# Altium PCB epfl_logo_example.PcbDoc
Units mm, origin at the board's own origin, x right, y up, seen from the top; angles counter-clockwise.
Board outline 90 x 105 mm, 2 copper layers (Top Layer, Bottom Layer); 5 components, 0 nets, 0 pads, 0 vias.
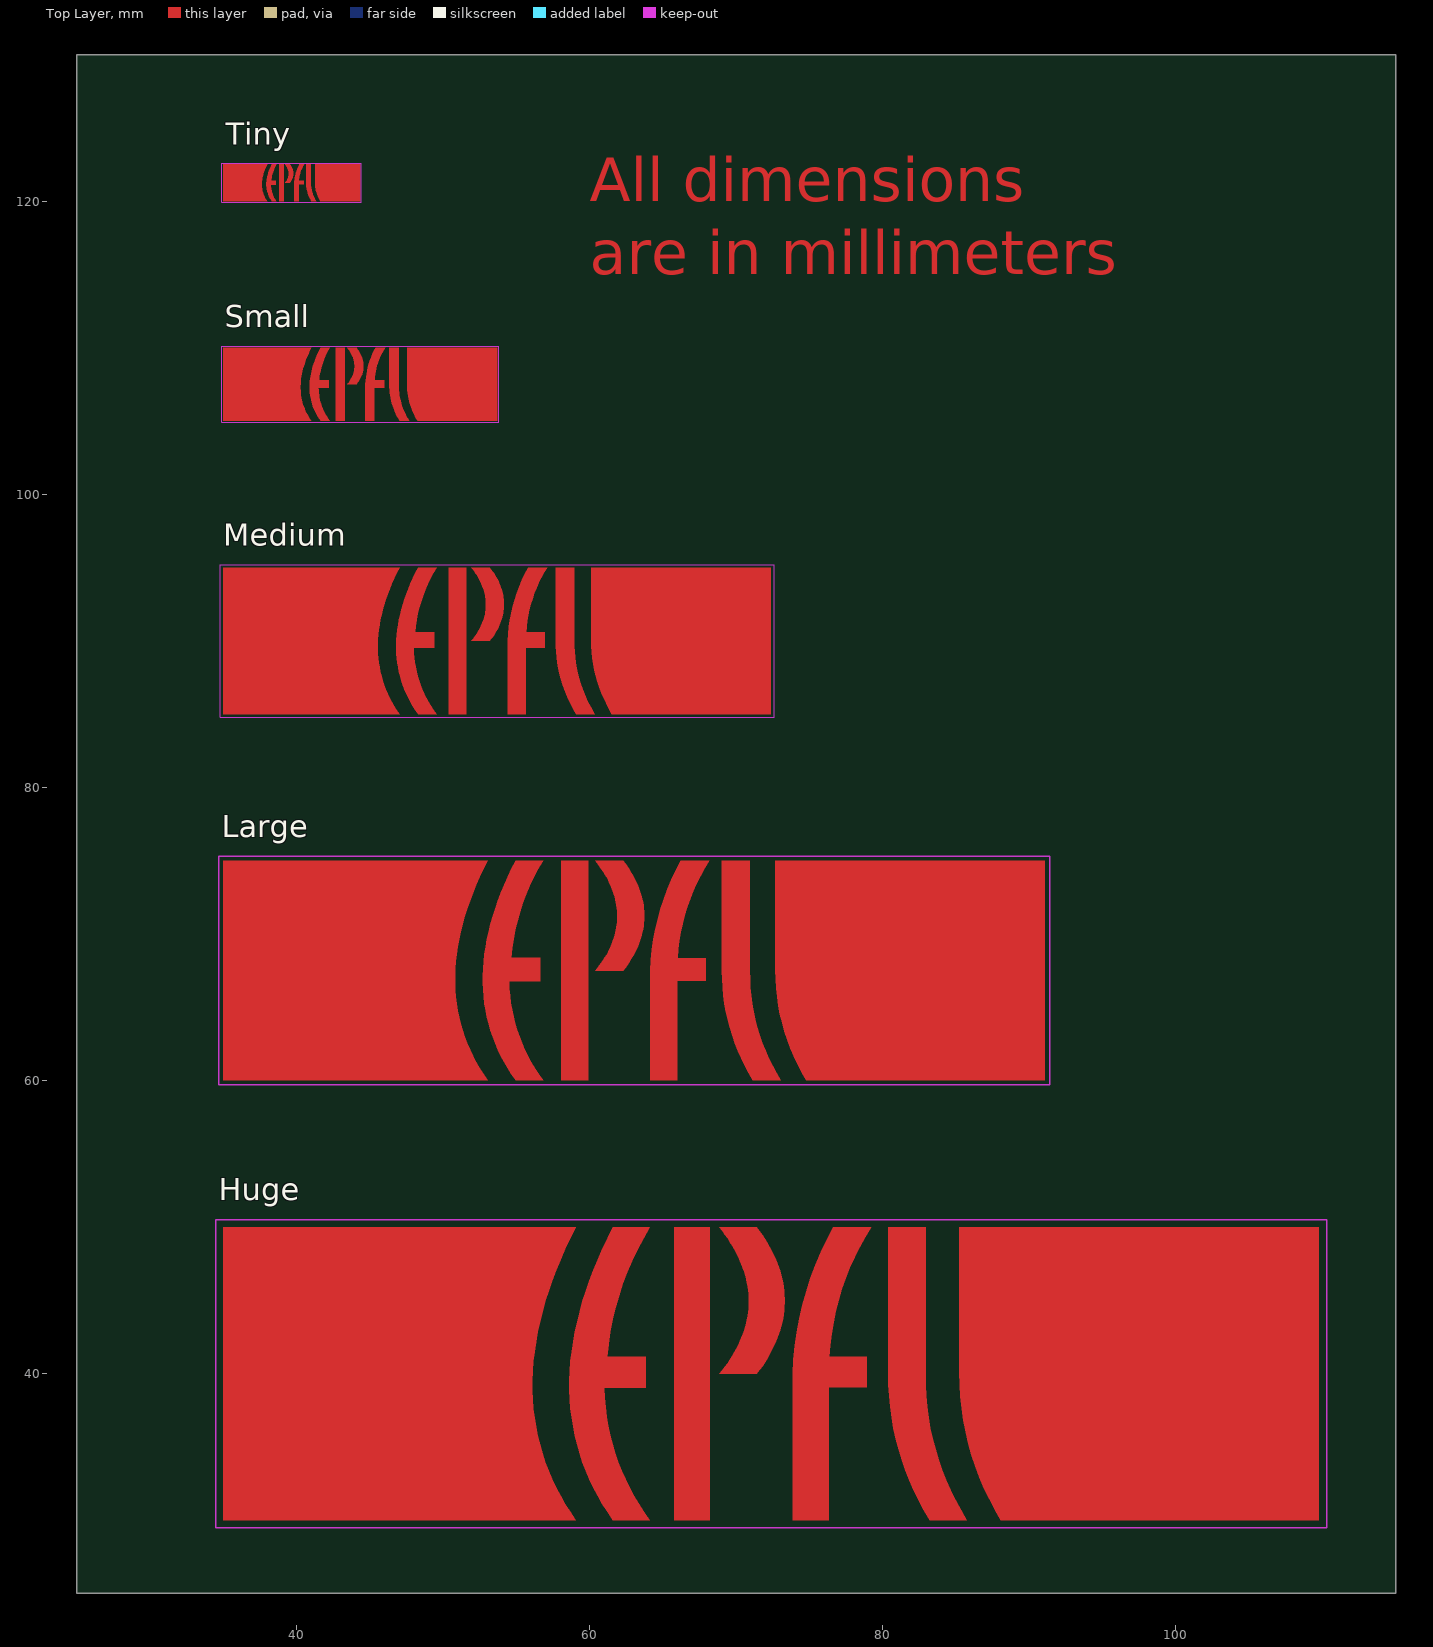
[diagram p0: Top Layer view]
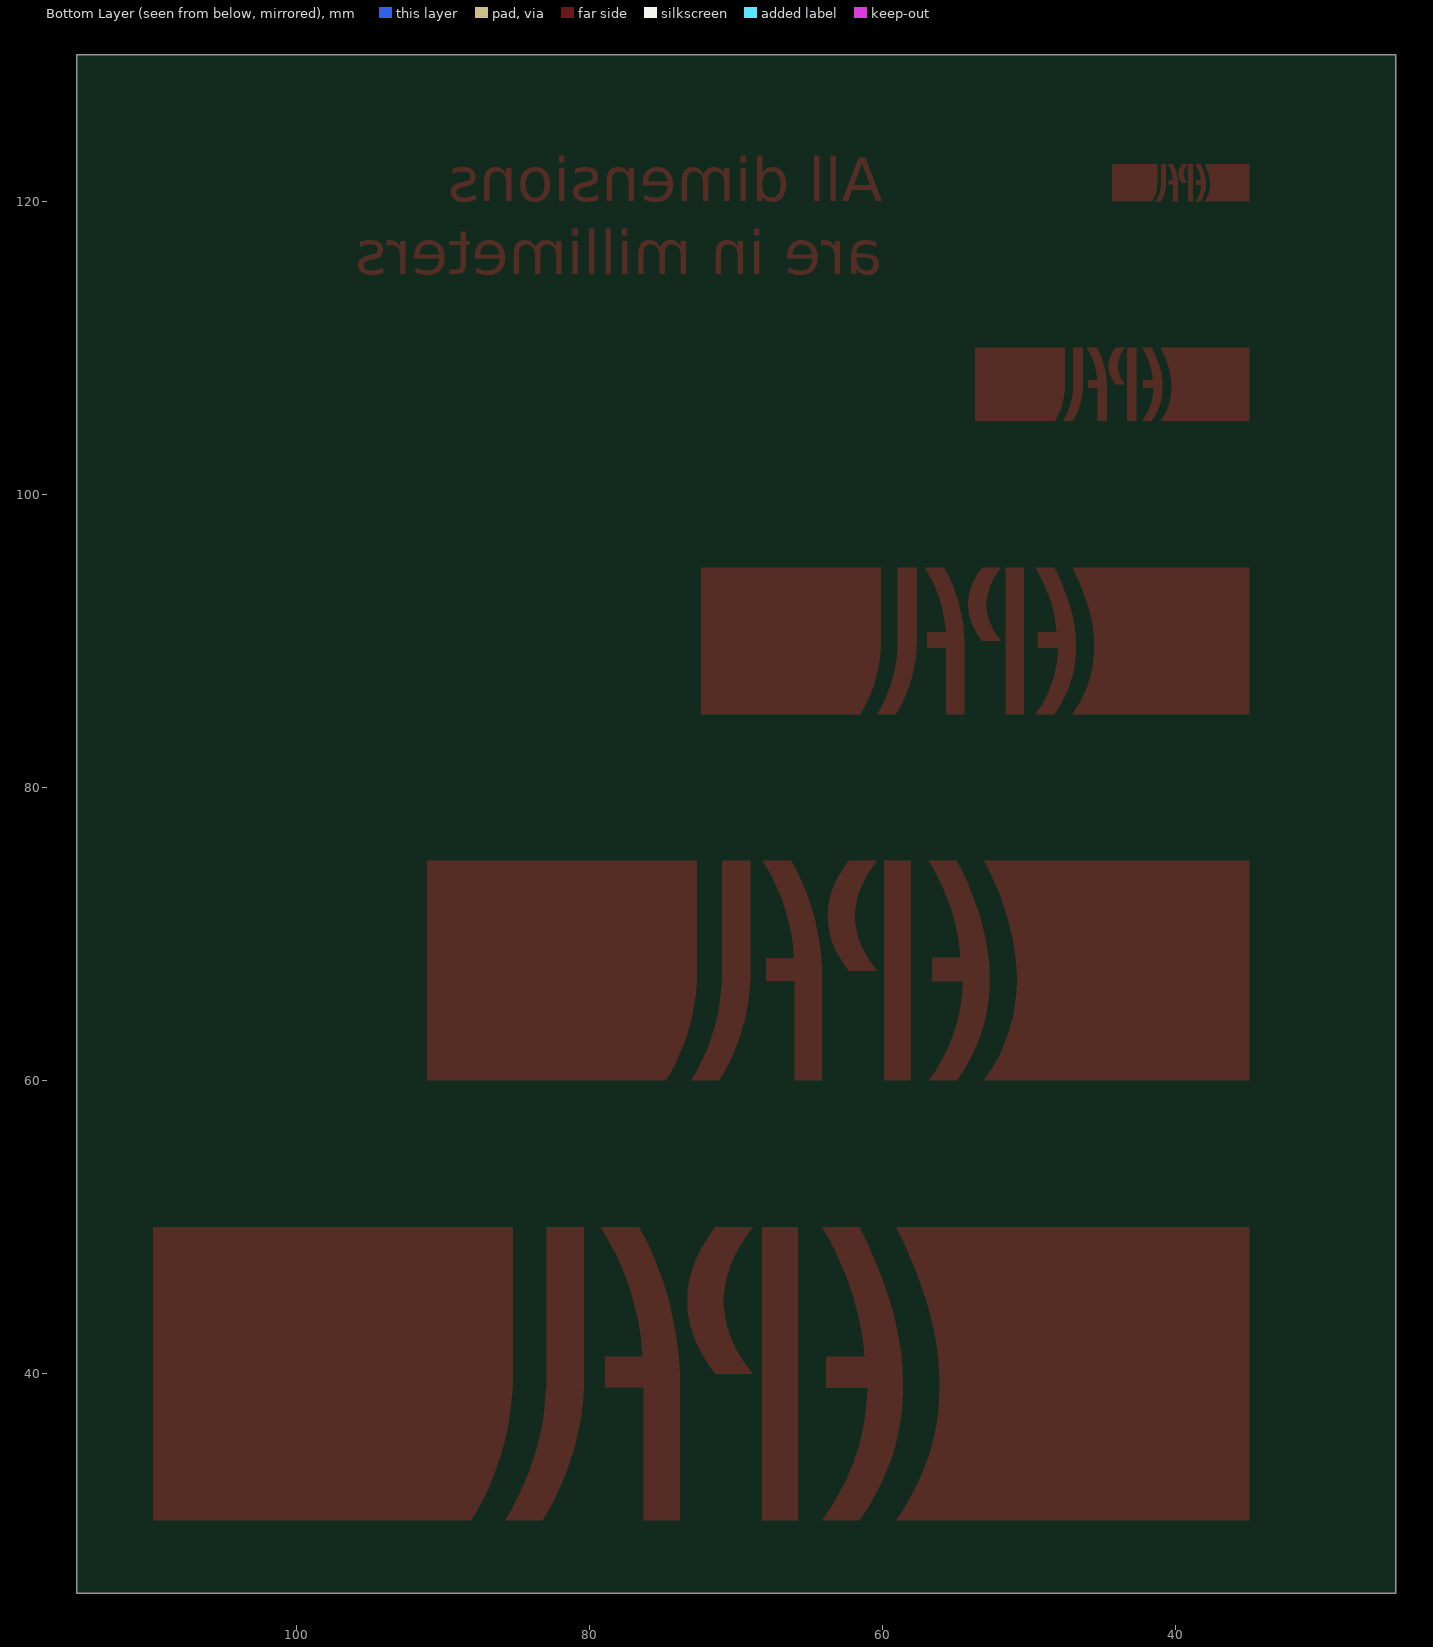
[diagram p1: Bottom Layer view, seen from below]

## Layer stack, top to bottom
Top Layer: signal copper 0.0356
Dielectric: dielectric 0.32, FR-4, Dk 4.8
Bottom Layer: signal copper 0.0356

## Board outline
25,25 25,130 115,130 115,25

## Design rules (kind name [scope] priority, off if disabled: settings)
Clearance [All] p1: gap=0.254
PolygonConnect [All] p1: connectstyle=Relief reliefconductorwidth=0.254 reliefentries=4 polygonreliefangle="90 Angle" airgapwidth=0.254
RoutingVias [All] p1: holewidth=0.711 width=1.27 viastyle="Through Hole" minholewidth=0.711 minwidth=1.27 maxholewidth=0.711 maxwidth=1.27
SolderMaskExpansion [All] p1: expansion=0.102
Width [All] p1: maxlimit=0.254 minlimit=0.254 preferedwidth=0.254
28 further rules are at their usual default settings.

## Components (designator, comment, footprint, x,y, rotation, side; value= is the part's Value field where it differs from the comment)
Huge "Comment" EPFL_LOGO_HUGE 35,30 r0 top
Large "Comment" EPFL_LOGO_LARGE 35,60 r0 top
Medium "Comment" EPFL_LOGO_MEDIUM 35,85 r0 top
Small "Comment" EPFL_LOGO_SMALL 35,105 r0 top
Tiny "Comment" EPFL_LOGO_TINY 35,120 r0 top

## Footprints (in the part's own frame and the unit in brackets; to place one, negate y for a bottom-side part, rotate by r counter-clockwise, add the part's x,y. Pads: shape width x height; smd on the part's side, far side on the other; paste and mask are expansions set on the pad)
EPFL_LOGO_HUGE [mm] "EPFL Logo, 74.76x20mm"
  Top Layer region: 21.177,7.608 21.127,8.24 21.102,8.879 21.102,9.524 21.127,10.176 21.177,10.834 21.251,11.499 21.35,12.171 21.474,12.85 21.623,13.535 21.796,14.226 21.995,14.925 22.218,15.63 22.466,16.342 22.739,17.06 23.036,17.785 23.359,18.517 23.706,19.255 24.078,20 0,20 0,0 24.078,0 23.706,0.545 23.359,1.097 23.036,1.656 22.739,2.221 22.466,2.793 22.218,3.372 21.995,3.957 21.796,4.549 21.623,5.148 21.474,5.753 21.35,6.365 21.251,6.983
  Top Layer region: 23.998,5.753 23.874,6.365 23.775,6.983 23.701,7.608 23.651,8.24 23.626,8.879 23.626,9.524 23.651,10.176 23.701,10.834 23.775,11.499 23.874,12.171 23.998,12.85 24.147,13.535 24.321,14.226 24.519,14.925 24.742,15.63 24.99,16.342 25.263,17.06 25.561,17.785 25.883,18.517 26.23,19.255 26.602,20 29.126,20 28.687,19.246 28.283,18.483 27.913,17.71 27.579,16.926 27.279,16.133 27.015,15.33 26.785,14.517 26.59,13.694 26.429,12.861 26.304,12.018 26.214,11.165 28.835,11.165 28.835,9.029 26.019,9.029 26.049,8.366 26.105,7.711 26.185,7.065 26.291,6.428 26.422,5.799 26.579,5.18 26.761,4.569 26.968,3.967 27.2,3.374 27.458,2.79 27.741,2.214 28.049,1.647 28.383,1.089 28.742,0.54 29.126,0 26.602,0 26.23,0.545 25.883,1.097 25.561,1.656 25.263,2.221 24.99,2.793 24.742,3.372 24.519,3.957 24.321,4.549 24.147,5.148
  Top Layer region: 30.777,0 30.777,20 33.204,20 33.204,0
  Top Layer region: 33.857,9.979 34.053,10.224 34.239,10.47 34.415,10.716 34.581,10.963 34.737,11.209 34.883,11.456 35.019,11.703 35.144,11.951 35.26,12.198 35.365,12.446 35.461,12.694 35.546,12.943 35.622,13.191 35.687,13.44 35.742,13.689 35.788,13.939 35.823,14.189 35.848,14.438 35.863,14.689 35.868,14.939 35.863,15.19 35.848,15.441 35.823,15.692 35.788,15.943 35.742,16.195 35.687,16.447 35.622,16.699 35.546,16.951 35.461,17.204 35.365,17.457 35.26,17.71 35.144,17.964 35.019,18.217 34.883,18.471 34.737,18.725 34.581,18.98 34.415,19.234 34.239,19.489 34.053,19.745 33.857,20 36.418,20 36.618,19.728 36.806,19.455 36.983,19.183 37.15,18.911 37.305,18.639 37.449,18.367 37.582,18.095 37.704,17.823 37.815,17.551 37.915,17.28 38.003,17.008 38.081,16.736 38.148,16.465 38.203,16.194 38.247,15.923 38.281,15.652 38.303,15.38 38.314,15.11 38.314,14.839 38.303,14.568 38.281,14.297 38.247,14.027 38.203,13.756 38.148,13.486 38.081,13.216 38.003,12.945 37.915,12.675 37.815,12.405 37.704,12.135 37.582,11.865 37.449,11.596 37.305,11.326 37.15,11.056 36.983,10.787 36.806,10.517 36.618,10.248 36.418,9.979
  Top Layer region: 38.86,0 38.86,9.979 38.914,10.939 39.007,11.889 39.14,12.83 39.313,13.761 39.525,14.682 39.776,15.593 40.068,16.494 40.398,17.385 40.769,18.267 41.179,19.138 41.628,20 44.228,20 43.816,19.321 43.435,18.632 43.085,17.931 42.767,17.22 42.48,16.497 42.225,15.764 42.001,15.02 41.808,14.266 41.647,13.5 41.518,12.723 41.419,11.936 41.353,11.138 43.916,11.138 43.916,9.066 41.312,9.066 41.312,0
  Top Layer region: 46.546,3.409 46.301,4.112 46.085,4.821 45.898,5.538 45.739,6.262 45.61,6.992 45.509,7.73 45.437,8.475 45.394,9.226 45.38,9.985 45.38,20 47.925,20 47.925,9.983 47.933,9.228 47.971,8.479 48.039,7.737 48.136,7.001 48.263,6.272 48.42,5.549 48.607,4.833 48.824,4.123 49.07,3.42 49.346,2.723 49.652,2.032 49.988,1.348 50.353,0.671 50.749,0 48.201,0 47.812,0.668 47.453,1.343 47.121,2.024 46.819,2.713
  Top Layer region: 50.509,6.804 50.391,7.604 50.306,8.411 50.254,9.228 50.235,10.053 50.235,20 74.757,20 74.757,0 53.058,0 52.643,0.722 52.261,1.452 51.911,2.191 51.595,2.938 51.312,3.694 51.062,4.459 50.845,5.232 50.661,6.014
  Top Layer keep-out lines w0.1: -0.5,-0.5 -0.5,20.5 75.3,20.5 75.3,-0.5 -0.5,-0.5
EPFL_LOGO_LARGE [mm] "EPFL Logo, 56.07x15mm"
  Top Layer region: 37.882,5.103 37.793,5.703 37.73,6.309 37.691,6.921 37.676,7.54 37.676,15 56.068,15 56.068,0 39.794,0 39.482,0.541 39.196,1.089 38.934,1.643 38.696,2.204 38.484,2.771 38.296,3.344 38.134,3.924 37.995,4.51
  Top Layer region: 34.909,2.557 34.726,3.084 34.564,3.616 34.423,4.154 34.305,4.696 34.207,5.244 34.132,5.798 34.078,6.356 34.045,6.92 34.035,7.489 34.035,15 35.944,15 35.944,7.488 35.95,6.921 35.978,6.36 36.029,5.803 36.102,5.251 36.198,4.704 36.315,4.162 36.455,3.625 36.618,3.092 36.803,2.565 37.01,2.042 37.239,1.524 37.491,1.011 37.765,0.503 38.062,0 36.151,0 35.859,0.501 35.589,1.007 35.341,1.518 35.114,2.035
  Top Layer region: 29.145,0 29.145,7.484 29.185,8.204 29.255,8.917 29.355,9.622 29.484,10.321 29.644,11.011 29.832,11.694 30.051,12.37 30.299,13.039 30.577,13.7 30.884,14.354 31.221,15 33.171,15 32.862,14.491 32.576,13.974 32.314,13.448 32.075,12.915 31.86,12.373 31.668,11.823 31.501,11.265 31.356,10.699 31.235,10.125 31.138,9.543 31.065,8.952 31.014,8.353 32.937,8.353 32.937,6.799 30.984,6.799 30.984,0
  Top Layer region: 25.393,7.484 25.54,7.668 25.68,7.853 25.811,8.037 25.936,8.222 26.053,8.407 26.162,8.592 26.264,8.778 26.358,8.963 26.445,9.149 26.524,9.335 26.596,9.521 26.66,9.707 26.716,9.894 26.765,10.08 26.807,10.267 26.841,10.454 26.867,10.641 26.886,10.829 26.897,11.016 26.901,11.204 26.897,11.392 26.886,11.58 26.867,11.769 26.841,11.957 26.807,12.146 26.765,12.335 26.716,12.524 26.66,12.713 26.596,12.903 26.524,13.093 26.445,13.283 26.358,13.473 26.264,13.663 26.162,13.853 26.053,14.044 25.936,14.235 25.811,14.426 25.68,14.617 25.54,14.808 25.393,15 27.314,15 27.463,14.796 27.605,14.591 27.738,14.387 27.862,14.183 27.979,13.979 28.087,13.775 28.187,13.571 28.278,13.367 28.361,13.163 28.436,12.96 28.503,12.756 28.561,12.552 28.611,12.349 28.652,12.145 28.686,11.942 28.71,11.739 28.727,11.535 28.735,11.332 28.735,11.129 28.727,10.926 28.71,10.723 28.686,10.52 28.652,10.317 28.611,10.114 28.561,9.912 28.503,9.709 28.436,9.506 28.361,9.304 28.278,9.101 28.187,8.899 28.087,8.697 27.979,8.494 27.862,8.292 27.738,8.09 27.605,7.888 27.463,7.686 27.314,7.484
  Top Layer region: 23.083,0 23.083,15 24.903,15 24.903,0
  Top Layer region: 17.999,4.315 17.906,4.773 17.831,5.237 17.776,5.706 17.738,6.18 17.72,6.659 17.72,7.143 17.738,7.632 17.776,8.126 17.831,8.624 17.906,9.128 17.999,9.637 18.11,10.151 18.241,10.67 18.389,11.194 18.557,11.722 18.743,12.256 18.947,12.795 19.17,13.339 19.412,13.887 19.673,14.441 19.951,15 21.845,15 21.515,14.435 21.212,13.862 20.935,13.282 20.684,12.695 20.459,12.1 20.261,11.497 20.088,10.888 19.942,10.27 19.822,9.646 19.728,9.013 19.66,8.374 21.626,8.374 21.626,6.772 19.515,6.772 19.537,6.274 19.579,5.783 19.639,5.299 19.718,4.821 19.817,4.35 19.934,3.885 20.071,3.427 20.226,2.975 20.4,2.531 20.593,2.092 20.806,1.661 21.037,1.236 21.287,0.817 21.556,0.405 21.845,0 19.951,0 19.673,0.409 19.412,0.823 19.17,1.242 18.947,1.666 18.743,2.095 18.557,2.529 18.389,2.968 18.241,3.412 18.11,3.861
  Top Layer region: 15.882,5.706 15.845,6.18 15.827,6.659 15.827,7.143 15.845,7.632 15.882,8.126 15.938,8.624 16.013,9.128 16.106,9.637 16.217,10.151 16.347,10.67 16.496,11.194 16.663,11.722 16.849,12.256 17.054,12.795 17.277,13.339 17.519,13.887 17.779,14.441 18.058,15 0,15 0,0 18.058,0 17.779,0.409 17.519,0.823 17.277,1.242 17.054,1.666 16.849,2.095 16.663,2.529 16.496,2.968 16.347,3.412 16.217,3.861 16.106,4.315 16.013,4.773 15.938,5.237
  Top Layer keep-out lines w0.1: -0.3,-0.3 56.4,-0.3 56.4,15.3 -0.3,15.3 -0.3,-0.3
EPFL_LOGO_MEDIUM [mm] "EPFL Logo, 37.38x10mm"
  Top Layer region: 25.255,3.402 25.196,3.802 25.153,4.206 25.127,4.614 25.118,5.026 25.118,10 37.379,10 37.379,0 26.529,0 26.322,0.361 26.13,0.726 25.956,1.095 25.798,1.469 25.656,1.847 25.531,2.229 25.422,2.616 25.33,3.007
  Top Layer region: 23.273,1.704 23.15,2.056 23.042,2.411 22.949,2.769 22.87,3.131 22.805,3.496 22.755,3.865 22.719,4.237 22.697,4.613 22.69,4.992 22.69,10 23.963,10 23.963,4.992 23.967,4.614 23.986,4.24 24.019,3.869 24.068,3.501 24.132,3.136 24.21,2.775 24.304,2.416 24.412,2.061 24.535,1.71 24.673,1.361 24.826,1.016 24.994,0.674 25.177,0.335 25.374,0 24.101,0 23.906,0.334 23.726,0.671 23.561,1.012 23.41,1.357
  Top Layer region: 19.43,0 19.43,4.989 19.457,5.469 19.504,5.945 19.57,6.415 19.656,6.88 19.762,7.341 19.888,7.796 20.034,8.247 20.199,8.693 20.384,9.133 20.589,9.569 20.814,10 22.114,10 21.908,9.661 21.717,9.316 21.542,8.965 21.383,8.61 21.24,8.249 21.112,7.882 21,7.51 20.904,7.133 20.824,6.75 20.759,6.362 20.71,5.968 20.676,5.569 21.958,5.569 21.958,4.533 20.656,4.533 20.656,0
  Top Layer region: 16.929,4.989 17.027,5.112 17.12,5.235 17.208,5.358 17.291,5.481 17.369,5.605 17.441,5.728 17.509,5.852 17.572,5.975 17.63,6.099 17.683,6.223 17.73,6.347 17.773,6.471 17.811,6.596 17.844,6.72 17.871,6.845 17.894,6.969 17.911,7.094 17.924,7.219 17.932,7.344 17.934,7.469 17.932,7.595 17.924,7.72 17.911,7.846 17.894,7.972 17.871,8.097 17.844,8.223 17.811,8.349 17.773,8.476 17.73,8.602 17.683,8.728 17.63,8.855 17.572,8.982 17.509,9.109 17.441,9.236 17.369,9.363 17.291,9.49 17.208,9.617 17.12,9.745 17.027,9.872 16.929,10 18.209,10 18.309,9.864 18.403,9.728 18.492,9.591 18.575,9.455 18.653,9.319 18.725,9.183 18.791,9.047 18.852,8.911 18.907,8.776 18.957,8.64 19.002,8.504 19.041,8.368 19.074,8.233 19.102,8.097 19.124,7.961 19.14,7.826 19.151,7.69 19.157,7.555 19.157,7.419 19.151,7.284 19.14,7.149 19.124,7.013 19.102,6.878 19.074,6.743 19.041,6.608 19.002,6.473 18.957,6.338 18.907,6.203 18.852,6.068 18.791,5.933 18.725,5.798 18.653,5.663 18.575,5.528 18.492,5.393 18.403,5.259 18.309,5.124 18.209,4.989
  Top Layer region: 15.388,0 15.388,10 16.602,10 16.602,0
  Top Layer region: 11.999,2.876 11.937,3.182 11.888,3.492 11.85,3.804 11.826,4.12 11.813,4.439 11.813,4.762 11.826,5.088 11.85,5.417 11.888,5.75 11.937,6.086 11.999,6.425 12.074,6.767 12.16,7.113 12.26,7.462 12.371,7.815 12.495,8.171 12.631,8.53 12.78,8.892 12.941,9.258 13.115,9.628 13.301,10 14.563,10 14.344,9.623 14.141,9.241 13.957,8.855 13.789,8.463 13.64,8.067 13.507,7.665 13.392,7.258 13.295,6.847 13.215,6.43 13.152,6.009 13.107,5.583 14.417,5.583 14.417,4.515 13.01,4.515 13.025,4.183 13.052,3.855 13.093,3.532 13.146,3.214 13.211,2.9 13.289,2.59 13.38,2.285 13.484,1.984 13.6,1.687 13.729,1.395 13.871,1.107 14.025,0.824 14.192,0.545 14.371,0.27 14.563,0 13.301,0 13.115,0.273 12.941,0.549 12.78,0.828 12.631,1.111 12.495,1.397 12.371,1.686 12.26,1.979 12.16,2.274 12.074,2.574
  Top Layer region: 10.588,3.804 10.563,4.12 10.551,4.439 10.551,4.762 10.563,5.088 10.588,5.417 10.625,5.75 10.675,6.086 10.737,6.425 10.811,6.767 10.898,7.113 10.997,7.462 11.109,7.815 11.233,8.171 11.369,8.53 11.518,8.892 11.679,9.258 11.853,9.628 12.039,10 0,10 0,0 12.039,0 11.853,0.273 11.679,0.549 11.518,0.828 11.369,1.111 11.233,1.397 11.109,1.686 10.997,1.979 10.898,2.274 10.811,2.574 10.737,2.876 10.675,3.182 10.625,3.492
  Top Layer keep-out lines w0.05: -0.2,-0.2 -0.2,10.2 37.6,10.2 37.6,-0.2 -0.2,-0.2
EPFL_LOGO_SMALL [mm] "EPFL Logo, 18.69x5mm"
  Top Layer region: 12.627,1.701 12.598,1.901 12.577,2.103 12.564,2.307 12.559,2.513 12.559,5 18.689,5 18.689,0 13.265,0 13.161,0.18 13.065,0.363 12.978,0.548 12.899,0.734 12.828,0.924 12.765,1.115 12.711,1.308 12.665,1.503
  Top Layer region: 11.636,0.852 11.575,1.028 11.521,1.205 11.474,1.385 11.435,1.565 11.402,1.748 11.377,1.933 11.359,2.119 11.348,2.307 11.345,2.496 11.345,5 11.981,5 11.981,2.496 11.983,2.307 11.993,2.12 12.01,1.934 12.034,1.75 12.066,1.568 12.105,1.387 12.152,1.208 12.206,1.031 12.268,0.855 12.337,0.681 12.413,0.508 12.497,0.337 12.588,0.168 12.687,0 12.05,0 11.953,0.167 11.863,0.336 11.78,0.506 11.705,0.678
  Top Layer region: 9.715,0 9.715,2.495 9.728,2.735 9.752,2.972 9.785,3.207 9.828,3.44 9.881,3.67 9.944,3.898 10.017,4.123 10.1,4.346 10.192,4.567 10.295,4.785 10.407,5 11.057,5 10.954,4.83 10.859,4.658 10.771,4.483 10.692,4.305 10.62,4.124 10.556,3.941 10.5,3.755 10.452,3.566 10.412,3.375 10.379,3.181 10.355,2.984 10.338,2.784 10.979,2.784 10.979,2.266 10.328,2.266 10.328,0
  Top Layer region: 8.464,2.495 8.513,2.556 8.56,2.618 8.604,2.679 8.645,2.741 8.684,2.802 8.721,2.864 8.755,2.926 8.786,2.988 8.815,3.05 8.841,3.112 8.865,3.174 8.887,3.236 8.905,3.298 8.922,3.36 8.936,3.422 8.947,3.485 8.956,3.547 8.962,3.61 8.966,3.672 8.967,3.735 8.966,3.797 8.962,3.86 8.956,3.923 8.947,3.986 8.936,4.049 8.922,4.112 8.905,4.175 8.887,4.238 8.865,4.301 8.841,4.364 8.815,4.428 8.786,4.491 8.755,4.554 8.721,4.618 8.684,4.681 8.645,4.745 8.604,4.809 8.56,4.872 8.513,4.936 8.464,5 9.105,5 9.154,4.932 9.202,4.864 9.246,4.796 9.287,4.728 9.326,4.66 9.362,4.592 9.396,4.524 9.426,4.456 9.454,4.388 9.479,4.32 9.501,4.252 9.52,4.184 9.537,4.116 9.551,4.048 9.562,3.981 9.57,3.913 9.576,3.845 9.578,3.777 9.578,3.71 9.576,3.642 9.57,3.574 9.562,3.507 9.551,3.439 9.537,3.371 9.52,3.304 9.501,3.236 9.479,3.169 9.454,3.101 9.426,3.034 9.396,2.966 9.362,2.899 9.326,2.831 9.287,2.764 9.246,2.697 9.202,2.629 9.154,2.562 9.105,2.495
  Top Layer region: 7.694,0 7.694,5 8.301,5 8.301,0
  Top Layer region: 6,1.438 5.969,1.591 5.944,1.746 5.925,1.902 5.913,2.06 5.907,2.22 5.907,2.381 5.913,2.544 5.925,2.709 5.944,2.875 5.969,3.043 6,3.212 6.037,3.384 6.08,3.557 6.13,3.731 6.186,3.907 6.248,4.085 6.316,4.265 6.39,4.446 6.471,4.629 6.558,4.814 6.65,5 7.282,5 7.172,4.812 7.071,4.621 6.978,4.427 6.895,4.232 6.82,4.033 6.754,3.832 6.696,3.629 6.647,3.423 6.607,3.215 6.576,3.004 6.553,2.791 7.209,2.791 7.209,2.257 6.505,2.257 6.512,2.091 6.526,1.928 6.546,1.766 6.573,1.607 6.606,1.45 6.645,1.295 6.69,1.142 6.742,0.992 6.8,0.844 6.864,0.697 6.935,0.554 7.012,0.412 7.096,0.272 7.185,0.135 7.282,0 6.65,0 6.558,0.136 6.471,0.274 6.39,0.414 6.316,0.555 6.248,0.698 6.186,0.843 6.13,0.989 6.08,1.137 6.037,1.287
  Top Layer region: 5.313,1.746 5.294,1.902 5.282,2.06 5.276,2.22 5.276,2.381 5.282,2.544 5.294,2.709 5.313,2.875 5.338,3.043 5.369,3.212 5.406,3.384 5.449,3.557 5.499,3.731 5.554,3.907 5.616,4.085 5.685,4.265 5.759,4.446 5.84,4.629 5.926,4.814 6.019,5 0,5 0,0 6.019,0 5.926,0.136 5.84,0.274 5.759,0.414 5.685,0.555 5.616,0.698 5.554,0.843 5.499,0.989 5.449,1.137 5.406,1.287 5.369,1.438 5.338,1.591
  Top Layer keep-out lines w0.05: -0.1,-0.1 18.8,-0.1 18.8,5.1 -0.1,5.1 -0.1,-0.1
EPFL_LOGO_TINY [mm] "EPFL Logo, 9.35x2.5mm"
  Top Layer region: 6.314,0.851 6.299,0.95 6.288,1.051 6.282,1.153 6.279,1.257 6.279,2.5 9.345,2.5 9.345,0 6.632,0 6.58,0.09 6.533,0.181 6.489,0.274 6.449,0.367 6.414,0.462 6.383,0.557 6.356,0.654 6.333,0.752
  Top Layer region: 5.818,0.426 5.788,0.514 5.761,0.603 5.737,0.692 5.717,0.783 5.701,0.874 5.689,0.966 5.68,1.059 5.674,1.153 5.672,1.248 5.672,2.5 5.991,2.5 5.991,1.248 5.992,1.154 5.996,1.06 6.005,0.967 6.017,0.875 6.033,0.784 6.053,0.694 6.076,0.604 6.103,0.515 6.134,0.427 6.168,0.34 6.207,0.254 6.248,0.169 6.294,0.084 6.344,0 6.025,0 5.977,0.083 5.932,0.168 5.89,0.253 5.852,0.339
  Top Layer region: 4.857,0 4.857,1.247 4.864,1.367 4.876,1.486 4.893,1.604 4.914,1.72 4.941,1.835 4.972,1.949 5.008,2.062 5.05,2.173 5.096,2.283 5.147,2.392 5.204,2.5 5.529,2.5 5.477,2.415 5.429,2.329 5.386,2.241 5.346,2.152 5.31,2.062 5.278,1.971 5.25,1.878 5.226,1.783 5.206,1.687 5.19,1.59 5.177,1.492 5.169,1.392 5.489,1.392 5.489,1.133 5.164,1.133 5.164,0
  Top Layer region: 4.232,1.247 4.257,1.278 4.28,1.309 4.302,1.34 4.323,1.37 4.342,1.401 4.36,1.432 4.377,1.463 4.393,1.494 4.407,1.525 4.421,1.556 4.433,1.587 4.443,1.618 4.453,1.649 4.461,1.68 4.468,1.711 4.473,1.742 4.478,1.774 4.481,1.805 4.483,1.836 4.484,1.867 4.483,1.899 4.481,1.93 4.478,1.961 4.473,1.993 4.468,2.024 4.461,2.056 4.453,2.087 4.443,2.119 4.433,2.15 4.421,2.182 4.407,2.214 4.393,2.245 4.377,2.277 4.36,2.309 4.342,2.341 4.323,2.372 4.302,2.404 4.28,2.436 4.257,2.468 4.232,2.5 4.552,2.5 4.577,2.466 4.601,2.432 4.623,2.398 4.644,2.364 4.663,2.33 4.681,2.296 4.698,2.262 4.713,2.228 4.727,2.194 4.739,2.16 4.75,2.126 4.76,2.092 4.768,2.058 4.775,2.024 4.781,1.99 4.785,1.956 4.788,1.923 4.789,1.889 4.789,1.855 4.788,1.821 4.785,1.787 4.781,1.753 4.775,1.72 4.768,1.686 4.76,1.652 4.75,1.618 4.739,1.584 4.727,1.551 4.713,1.517 4.698,1.483 4.681,1.449 4.663,1.416 4.644,1.382 4.623,1.348 4.601,1.315 4.577,1.281 4.552,1.247
  Top Layer region: 3.847,0 3.847,2.5 4.15,2.5 4.15,0
  Top Layer region: 2.984,0.796 2.972,0.873 2.963,0.951 2.956,1.03 2.953,1.11 2.953,1.19 2.956,1.272 2.963,1.354 2.972,1.437 2.984,1.521 3,1.606 3.018,1.692 3.04,1.778 3.065,1.866 3.093,1.954 3.124,2.043 3.158,2.132 3.195,2.223 3.235,2.315 3.279,2.407 3.325,2.5 3.641,2.5 3.586,2.406 3.535,2.31 3.489,2.214 3.447,2.116 3.41,2.017 3.377,1.916 3.348,1.815 3.324,1.712 3.304,1.608 3.288,1.502 3.277,1.396 3.604,1.396 3.604,1.129 3.252,1.129 3.256,1.046 3.263,0.964 3.273,0.883 3.286,0.803 3.303,0.725 3.322,0.647 3.345,0.571 3.371,0.496 3.4,0.422 3.432,0.349 3.468,0.277 3.506,0.206 3.548,0.136 3.593,0.068 3.641,0 3.325,0 3.279,0.068 3.235,0.137 3.195,0.207 3.158,0.278 3.124,0.349 3.093,0.421 3.065,0.495 3.04,0.569 3.018,0.643 3,0.719
  Top Layer region: 2.656,0.873 2.647,0.951 2.641,1.03 2.638,1.11 2.638,1.19 2.641,1.272 2.647,1.354 2.656,1.437 2.669,1.521 2.684,1.606 2.703,1.692 2.725,1.778 2.749,1.866 2.777,1.954 2.808,2.043 2.842,2.132 2.88,2.223 2.92,2.315 2.963,2.407 3.01,2.5 0,2.5 0,0 3.01,0 2.963,0.068 2.92,0.137 2.88,0.207 2.842,0.278 2.808,0.349 2.777,0.421 2.749,0.495 2.725,0.569 2.703,0.643 2.684,0.719 2.669,0.796
  Top Layer keep-out lines w0.025: -0.075,-0.075 -0.075,2.575 9.425,2.575 9.425,-0.075 -0.075,-0.075

## Nets (pads, with @x,y where several pads share a name; then routed paths per layer and width w, separated by ;. In a path a pad name is that pad's centre, name@x,y a point inside that pad or via, vN(x,y) a via of type N, cw(c..) or ccw(c..) an arc to the next point about the centre after c; other vN are vias at no path point)

## Other copper
Top Layer:
  text "All dimensions" at 60,120 h3
  text "are in millimeters" at 60,115 h3

## Silkscreen, mask and mechanical layers (free items; w line width, h text height)
Mechanical 1:
  the board outline again, w0.025

## Dimensions
35,50 to 35,30 on Top Layer
35,30 to 109.757,30 on Top Layer
35,60 to 91.068,60 on Top Layer
35,75 to 35,60 on Top Layer
35,95 to 35,85 on Top Layer
35,85 to 72.379,85 on Top Layer
35,105 to 53.689,105 on Top Layer
35,110 to 35,105 on Top Layer
35,122.5 to 35,120 on Top Layer
35,120 to 44.345,120 on Top Layer